# Altium PCB roneCPUBoard-v8.PcbDoc (part 2 of 3)
Units mil, origin at the board's own origin, x right, y up, seen from the top; angles counter-clockwise.
Board outline 3919.58 x 3919.51 mil, 2 copper layers (Top Layer, Bottom Layer); 146 components, 122 nets, 569 pads, 329 vias.
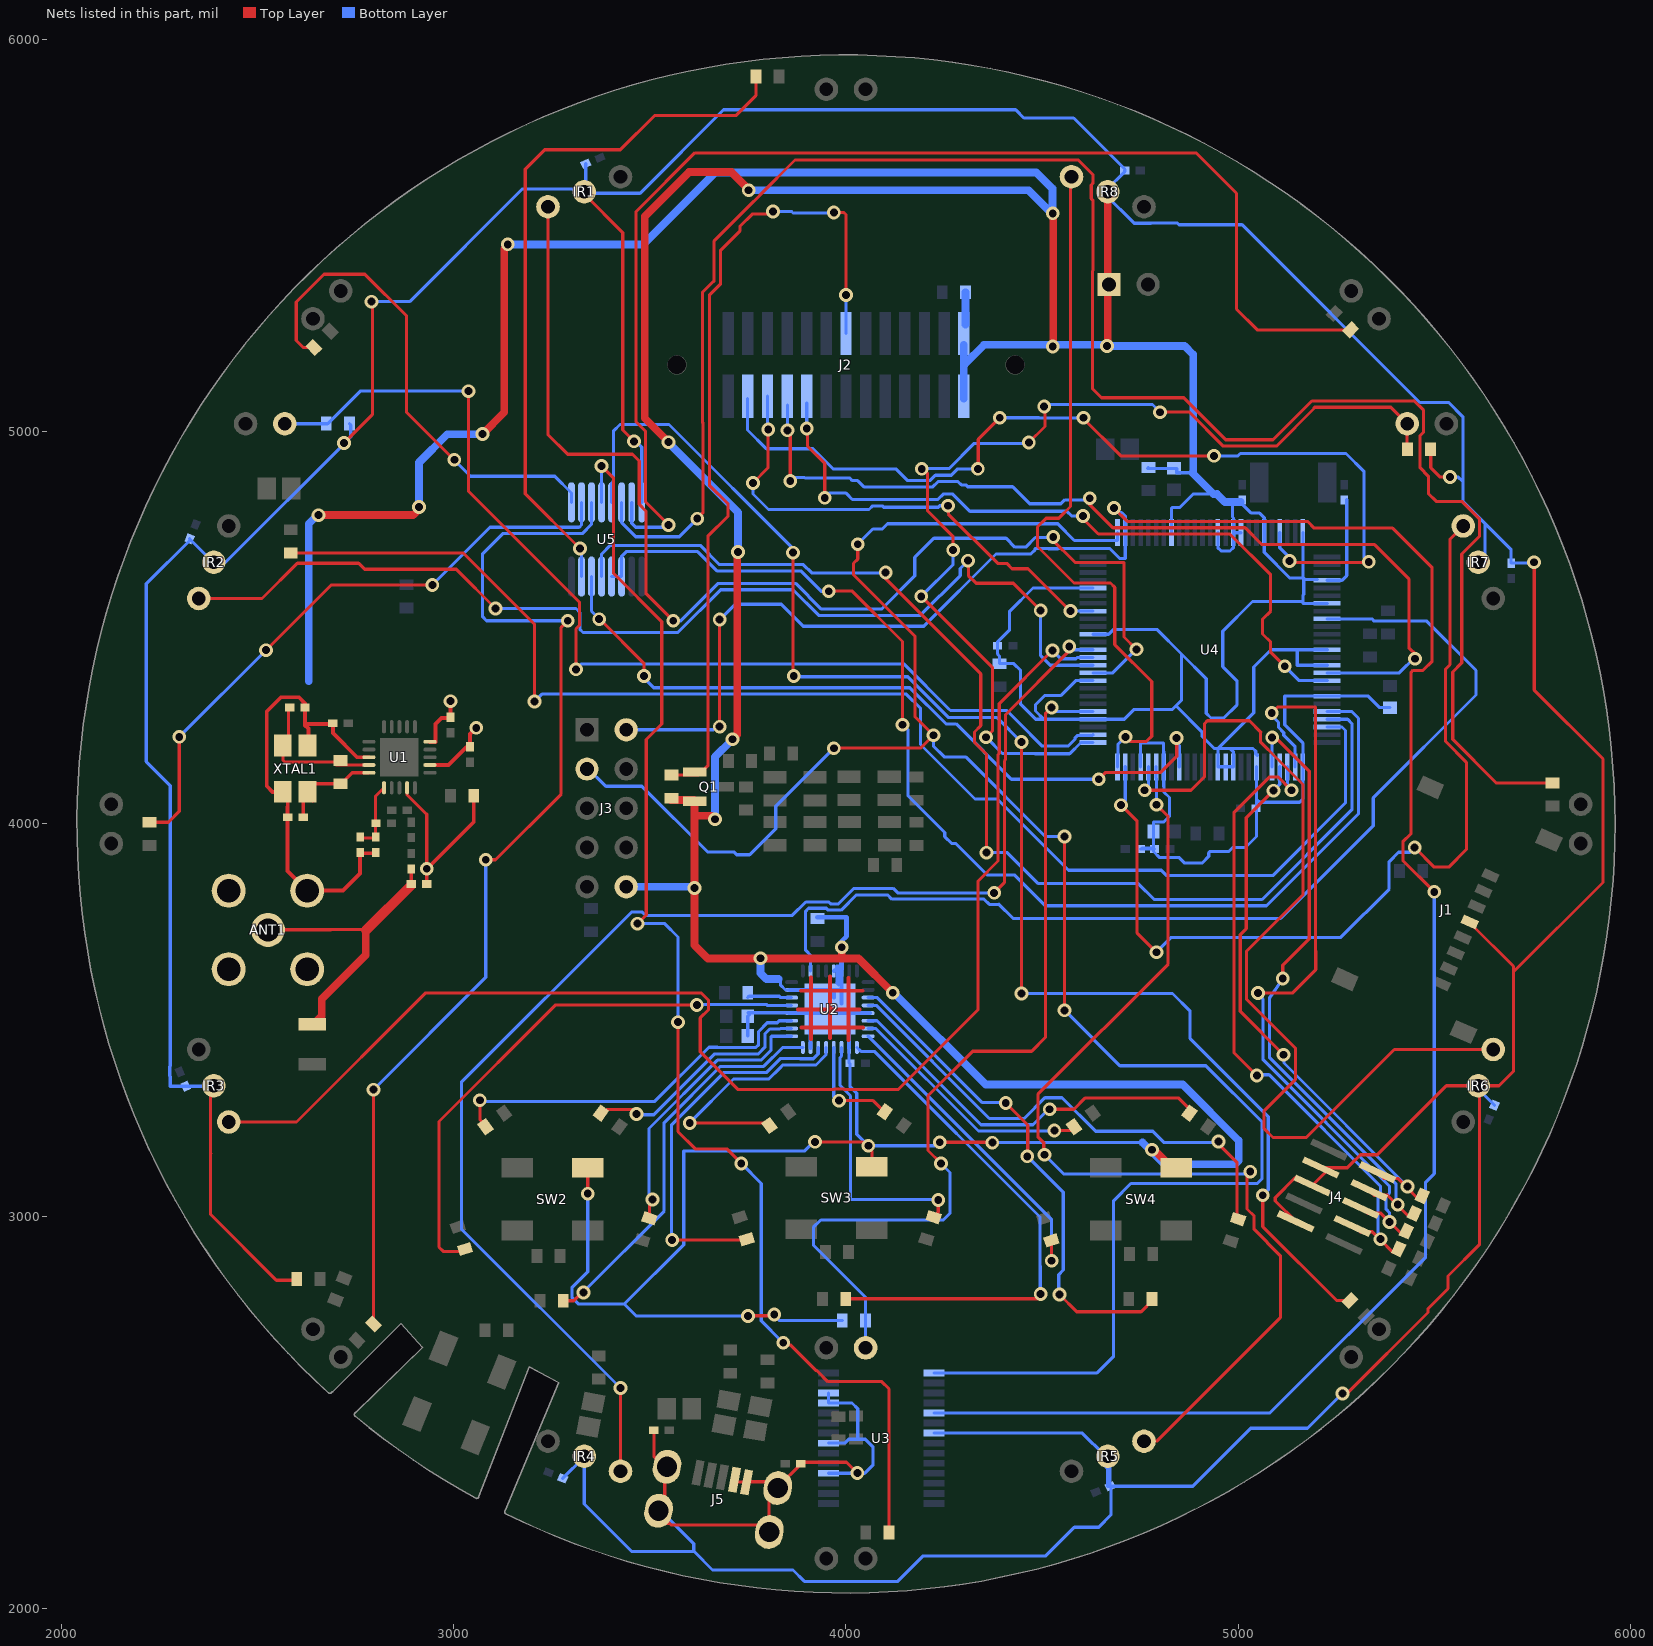
[diagram p2: the nets of this part, all layers, seen from the top]

## Via types
v1: diameter 35, hole 20, Top Layer to Bottom Layer, 321 vias
v2: diameter 25.98, hole 12.99, Top Layer to Bottom Layer, tented top, 4 vias
v3: diameter 110, hole 89, Top Layer to Bottom Layer, 4 vias

## Nets (pads, with @x,y where several pads share a name; then routed paths per layer and width w, separated by ;. In a path a pad name is that pad's centre, name@x,y a point inside that pad or via, vN(x,y) a via of type N, cw(c..) or ccw(c..) an arc to the next point about the centre after c; other vN are vias at no path point) (continued)
FTDI_RX: J3.3 U3.1 U4.26 | length 5383.3
  Top Layer w8: v1(3969,4193) 3970,4194 4191,4194 v1(4223,4226) 4176,4273 4176,4478.25 4019,4635.25 4019,4664 4030,4675 v1(4030,4713) ; v1(4557,3525) v1(4557,3968)
  Bottom Layer w8: J3.3@3340,4144 3388,4096 3480,4096 3647,3929 3714.28,3929 3721.78,3921.5 3754.5,3921.5 3821,3988 3821,4045 v1(3969,4193) ; v1@4032,4715 4068.5,4751.5 4092.22,4751.5 4105.72,4765 4539.5,4765 4582,4722.5 4691.78,4722.5 U4.26@4691.78,4742.23 ; v1(4223,4226) 4234,4226 4223,4215 4223,4198 4250,4171 4304.87,4171 4507.87,3968 v1(4557,3968) ; U3.1@4224,2601.34 U3.1@4224.45,2601.34 4640,2601.34 4682,2643.34 4682,3040 4726,3084 5048,3084 5060,3096 5060,3241 4917,3384 4698,3384 v1(4557,3525)
FTDI_TX: J3.2 U3.5 U4.27 | length 5970.4
  Top Layer w8: v1(3678,4248) v1(3678,4521) ; v1(4683,4805) 4717,4771 5176,4771 5193,4754 5238,4754 ; 5240,4754 5393,4754 5493.67,4653.33 5493.67,4414.8 5470.37,4391.5 5444.5,4391.5 5440,4387 5440,3975.74 5419,3954.74 5419,3907 v1(5499,3827)
  Bottom Layer w8: J3.2@3442,4240 3662,4240 3678,4256 v1(3678,4248) ; v1@3678,4520 3718,4560 3835,4560 3891,4504 4198.37,4504 4382.37,4688 4471,4688 4482,4699 4482,4702 4515.28,4702 4515.78,4701.5 4540.22,4701.5 4540.72,4702 4672,4702 4697.46,4676.54 4711.46,4676.54 U4.27@4711.46,4742.23 4711.46,4784 4702.46,4793 4695,4793 v1(4683,4805) ; U3.5@4224.45,2498.98 5079.98,2498.98 5477,2896 5477,3087 5499,3109 v1(5499,3827)
GND: ANT1.2 ANT1.3 ANT1.4 ANT1.5 C1.1 C2.1 C3.1 C4.1 C6.1 C7.1 C8.1 C9.1 C10.1 C11.1 C12.1 C13.1 C14.1 C15.1 C16.1 C17.1 C18.1 C20.1 C21.1 C22.1 C23.1 C24.1 C25.1 C26.1 C27.1 C28.1 C29.1 C30.1 C31.1 C32.1 IR1.2 IR2.2 IR3.2 IR4.2 IR5.2 IR6.2 IR7.2 IR8.2 J1.4 J2.25 J2.26 J3.10 J4.3 J4.5 J4.9 J5.4 J5.5 J5.6 J5.7 J5.8 J5.9 J6.1 Q1.2 R2.1 R6.2 R9.2 R25.1 R28.2 R35.1 R40.1 R41.1 R56.2 R68.1 SW2.2 SW3.2 SW4.2 U1.8 U1.14 U1.17 U1.20 U2.5 U2.10 U2.15 U2.20 U2.23 U2.29 U2.30 U2.33 U3.7 U3.18 U3.21 U3.25 U3.26 U4.4 U4.9 U4.15 U4.21 U4.33 U4.39 U4.41 U4.42 U4.45 U4.50 U4.54 U4.57 U4.63 U4.65 U4.69 U4.76 U4.82 U4.85 U4.86 U4.87 U4.94 U4.97 U5.8 XTAL1.2 XTAL1.4 | length 41129.3
  Top Layer w8: IR3.2@2381,3330 2381,3161 ; 2382,3160 2381,3161 ; XTAL1.2@2567,4081.89 2577.32,4071.57 2577.32,4043 ; R68.1@2600.47,2840 2598.38,2837.38 2548.62,2837.38 2381,3005 2381,3161 ; v1(2721,4971) 2793,5043 v1@2793,5332 ; C4.1@2762,3927.32 2762,3925.32 C3.1@2802,3925.32 ; U1.14@2881.69,4092.24 2881.69,4074.46 2881.46,4074.46 2931.69,4024.23 ; 3051.53,4005.53 R2.1@3051.53,4072 ; IR4.2@3333,2389 3341,2397 IR4.2@3341,2381 ; IR1.2@3334,5604 3431,5507 3431,5004 v1(3460,4975) ; v1(3342,3058) SW2.2@3342,3124 ; C15.1@3507.88,2457.43 C15.1@3510.32,2455 3510.32,2388.68 3539,2360 J5.6@3537,2358 ; J5.7@3522.3,2250.06 J5.7@3538,2234.36 ; J5.6@3538,2325.11 3543.89,2331 J5.6@3543.89,2333.89 ; J5.6@3543.89,2362.17 J5.6@3543.89,2333.89 ; R35.1@3545,4065.47 R35.1@3563,4065.47 ; Q1.2@3613.53,4065.47 3613.53,4057.6 Q1.2@3614.57,4057.6 ; J5.4@3715.93,2329.04 3715.93,2350 3720,2350 3720,2326 3716.04,2326 3716.04,2322.96 J5.5@3746.86,2322.96 ; 3736,2214 3558.36,2214 ; J5.5@3746.86,2307.83 J5.5@3746.86,2322.96 ; J5.5@3746.86,2323.09 J5.5@3746.86,2322.96 ; v1@3759,2747 v1@3815,2747 ; J5.9@3824,2308 3889.69,2373.69 4001.31,2373.69 v1(4029,2346) ; J5.9@3826.11,2307.83 J5.9@3804,2307.83 ; v1(3921,3190) v1@4043,3190 ; SW3.2@4066,3127 v1@4066,3166 ; v1(4239,3189) v1@4373,3189 ; IR8.2@4667,5611 IR8.2@4667,5614 ; SW4.2@4831,3124 SW4.2@4842,3124 ; J4.9@5145.68,2987.44 5094,3039.12 5094,3048 5145,3099 5154,3090 J4.5@5160,3090 ; J4.3@5209.57,3124.46 5277.46,3124.46 5297,3144 ; v1@5266,2549 5277.02,2549 5483,2754.98 5483,2765 5534,2816 5534,2848 5614.73,2928.73 5614.73,3329.27 IR6.2@5611,3333 5530,3333 5354,3157 5311,3157 ; 5312,3158 5311,3157 ; R9.2@5489.53,4955 5490,4952 5490,4908 5514,4884 v1(5539,4884) ; J1.4@5594,3744 5701,3637 ; IR6.2@5629,3333 5664,3333 5701,3370 5701,3637 ; v1@5753,4657 5754,4656 5754,4341 5929,4166 5929,3851 5701,3623 5701,3637 ; J5.7@3538,2234.36 3538,2218 3550,2218 3554,2214 3558.36,2214 ; J5.7@3538,2234.36 3538,2328 J5.6@3543.89,2333.89 ; 3558.36,2214 3804,2214 J5.9@3804,2307.83 ; J5.5@3746.86,2322.96 3746.96,2322.96 3746.96,2329.04 3746.86,2329.04 3751,2324.9 3751,2324 3804,2324 J5.9@3804,2307.83 ; J4.3@5221.76,3112.27 5224,3114.51 5233.49,3124 5278,3124 5311,3157 ; J4.3@5221.76,3112.27 J4.5@5188.27,3078.78 J4.3@5221.76,3112.27
  Top Layer w10: XTAL1.2@2567,4081.89 XTAL1.2@2565,4081.89 2539,4081.89 2524,4096.89 2524,4287 2560,4323 2606,4323 2621.69,4307.31 ; 2577.32,4043 C2.1@2577.32,4017 2577.32,3879.68 ANT1.4@2627,3830 ; C1.1@2621.69,4295 2621.69,4251.31 2629.99,4243 2629.99,4200 XTAL1.4@2627.99,4200 ; 2623,4255 2692.32,4255 2692.32,4231.68 2754,4170 U1.8@2784.24,4170 ; ANT1.4@2626,3830 ANT1.4@2627,3830 ; C4.1@2762,3925.32 2762,3874 2718,3830 ANT1.4@2627,3830 ; C6.1@2931.69,3845 C6.1@2931.69,3847 2931.69,3885.69 3051.53,4005.53 ; v1(2931.69,3886) 2931.69,4024.23 ; U1.17@2939.76,4150.32 2987,4150.32 3031.37,4194.69 3042,4194.69 C9.1@3042,4196.69 3042,4229 v1(3058,4245) ; U1.20@2939.76,4209.37 2954,4209.37 2954,4254.69 2969,4269.69 2992,4269.69 C7.1@2992,4271.69 v1(2992,4313) ; 3878,3527 4035,3527 ; 3885,3575 4042,3575 ; 3886,3481 4043,3481 ; 3911,3452 3911,3609 ; 3959,3455 3959,3612 ; 4006,3450 4006,3607
  Top Layer w20: v1(2656,4787) 2897,4787 v1@2915,4805 ; v1(3074,4994) 3129,5049 3129,5465 v1@3135,5471 ; v1(3548,4973) 3487,5034 3487,5548 3600,5661 3708,5661 v1@3753,5616 ; R35.1@3554,4061 Q1.2@3612.53,4061 ; Q1.2@3613.53,4057.6 3613.53,4021 ; v1@3656,4021 3613.53,4021 ; v1@3723,4228 v1@3723,4688 ; v1(3989,3686) 3989,3657 ; v1(4119,3570) 4032,3657 3989,3657 ; v1@4528,5217 v1@4528,5556 ; v1@4667,5218 IR8.2@4667,5611 ; v1@4782.5,3172.5 SW4.2@4831,3124 ; 3613.53,4021 3613.53,3691.47 3648,3657 3989,3657
  Bottom Layer w8: C11.1@2327.47,4726.81 C11.1@2329.64,4724.64 ; C11.1@2330,4725 C11.1@2329.64,4724.64 ; IR2.2@2389,4667 2419,4667 2730,4978 v1@2731,4978 ; IR3.2@2400,3331.81 C17.1@2317.53,3331.81 2278.19,3331.81 2278.19,3356.25 2276.85,3357.58 2276.85,3381.63 2278.19,3382.96 2278.19,4097.81 2217,4159 2217,4612 C11.1@2329.64,4724.64 ; v1@2730.5,4978.5 2738,4986 2738,5017 R6.2@2734.53,5020 ; v1(2791,5331) 2888,5331 3175,5618 IR1.2@3333,5618 ; C23.1@3278.19,2332.47 3278.47,2332.47 IR4.2@3333,2387 ; IR4.2@3333,2389 IR4.2@3333,2387 ; IR1.2@3333,5611 3336.73,5607.27 3475.27,5607.27 3688,5820 4432.37,5820 4453.37,5799 4580,5799 C12.1@4711,5668 ; IR1.2@3336.81,5607.19 IR1.2@3343,5601 ; IR1.2@3336.81,5611 C10.1@3336.81,5682.47 ; v1(3342,3058) 3342,2858.72 3301.5,2818.22 3301.5,2793.78 3318.78,2776.5 3435.22,2776.5 ; v1@3463,4977 3479.57,4960.43 U5.8@3479.57,4819.49 ; J5.7@3529,2249 3612,2166 3612,2147 ; C21.1@3749.56,3460 C14.1@3749.56,3510 C14.1@3754.95,3515.39 ; v1(3750,2746) 3466,2746 3435.36,2776.64 3586.5,2927.78 3586.5,3167 3895,3167 v1@3917,3189 ; C14.1@3750,3519 3856,3519 U2.20@3855,3518 ; v1@3817,2748 3830,2735 R28.2@3990.47,2735 ; 3832.83,3600.17 3832.83,3589.89 3845.72,3577 3856,3577 U2.23@3859,3577 ; U3.21@3955.55,2422.2 3997.2,2422.2 4007,2432 ; U3.25@3955.55,2524.57 4015.43,2524.57 4030,2510 4030,2432 ; U3.25@3955.55,2527.45 U3.26@3955.55,2550.16 ; U2.29@3969,3625.44 U2.29@3968.84,3625.44 3969,3625.6 3976,3632.6 3976,3638 3983,3638 3983,3593.72 3982.24,3593.72 ; 3976,3595 U2.33@3981.24,3589.76 ; 3977,3598.96 3977,3629 ; U2.30@3988.53,3625.44 U2.30@3988.53,3628.62 ; 4008,2432 4030,2432 ; C20.1@4008,3391 U2.10@4008,3429 ; C20.1@4010,3390 4010,3331.35 4027.5,3313.85 4027.5,3209.5 v1(4057,3180) v1@4227,3180 ; v1@4027.57,2345.43 U3.18@3955.55,2345.43 4047.43,2345.43 4069,2367 4069,2412 4049,2432 4030,2432 ; v1(4029,2346) v1@4029,2359.28 ; U3.7@4224.45,2447.8 4602.2,2447.8 4659,2391 4663,2391 4663,2360 4667,2356 ; v1(4373,3188) 4756,3188 ; U4.9@4629.77,4365.26 4585.26,4365.26 4547,4327 4506,4327 4483,4304 4483,4288 4504.17,4266.83 ; U4.15@4629.77,4483.37 4669.37,4483.37 4682,4496 4792,4496 4855,4433 ; U4.21@4629.77,4601.48 4476.48,4601.48 4417.08,4542.08 4417.08,4495.08 4386.32,4464.32 C22.1@4386.32,4454 4386.32,4432.68 4391,4428 R41.1@4391,4408.53 4427.47,4408.53 4445,4391 4445,4304.92 4483.09,4266.83 4504.17,4266.83 ; IR8.2@4661,5604 4734.27,5530.73 4776.78,5530.73 4777.05,5531 4844.63,5531 4848.63,5527 4995,5527 ; IR5.2@4667,2389 4667,2356 ; IR8.2@4667,5611 4667,5617 4665,5617 4710.32,5662.32 C12.1@4710.32,5665 ; IR5.2@4673.19,2382.81 C24.1@4673.19,2313 ; C28.1@4750.69,3936 4767.44,3936 ; U4.97@4750.83,4145.77 4750.83,4204.83 4752,4206 4771,4206 ; C28.1@4754.56,3938.56 C32.1@4783.44,3938.56 ; 4767.44,3938.56 4767.44,3936 ; 4767.94,4206 4771,4206 ; R40.1@4771,4908.53 4768.04,4905.96 4842.96,4905.96 4842.96,4894.92 4882.4,4894.92 ; C32.1@4786.31,3936 C32.1@4783.44,3936 ; U4.33@4829.57,4742.23 4829.57,4805.12 ; 4830.6,4806.15 4849.84,4806.15 4884.19,4840.5 4936.82,4840.5 ; 4840.89,4300.89 4908,4233.79 4908,4223 4939,4192 4947.69,4192 ; 4855,5527 4995,5527 ; U4.39@4947.69,4742.23 4947.69,4704 4956.19,4695.5 4978.56,4695.5 4987.06,4704 U4.41@4987.06,4742.23 ; 4985,4782.06 4985,4820.31 ; 4987.06,4780 U4.41@4987.06,4742.23 ; C29.1@5006,4819 5033,4792 5054,4792 5065.8,4780.2 U4.45@5065.8,4742.23 5065.8,4692 5131.3,4626.5 5166.61,4626.5 ; U4.42@5006.74,4742.23 U4.41@4987.06,4742.23 ; U4.82@5046.11,4145.77 5046.11,4063.65 ; U4.82@5047.89,4175 5044.33,4178.56 5044.33,4185.19 5037.3,4192.22 4995.86,4192.22 4995.64,4192 4979.06,4192 ; 5150,4440.06 5150,4404.63 U4.65@5226.23,4404.63 ; 5164.22,4626.78 U4.50@5164.22,4742.23 ; 5165,4583.17 5165,4567 ; 5166.61,4584.78 5166.61,4626.5 ; 5166.61,4626.61 5166.61,4626.5 ; U4.54@5201.06,4622.94 5170.17,4622.94 5166.61,4626.5 ; U4.63@5226.23,4444 5083,4444 5039,4400 5039,4283.31 4947.69,4192 ; U4.57@5226.23,4562.11 5165,4562.11 5165,4567 ; U4.54@5226.23,4621.17 5264.17,4621.17 5276,4633 C30.1@5276,4826.31 ; v1@5266,2550 5176,2460 5031,2460 4883.53,2312.53 C24.1@4675,2312.53 ; C27.1@5386,4296.44 5360.28,4296.44 5330.83,4325.89 U4.69@5226.23,4325.89 5118,4325.89 5118,4252.96 5164.22,4206.74 U4.76@5164.22,4145.77 5164.22,4095.5 5164.5,4095.22 5164.5,4064 5156,4055.5 5054.26,4055.5 5046.11,4063.65 ; v1(5539,4884) 5560,4884 5571,4873 ; IR6.2@5611,3332 5611,3324.72 C18.1@5652.53,3283.19 ; IR7.2@5612.31,4664.69 5628,4680.37 5628,4766 ; v1@5757.69,4664.69 C13.1@5695,4664.69 5695,4699 5628,4766 ; C11.1@2329.64,4724.64 2389.28,4665 2388.14,4666.14 C11.1@2329.64,4724.64 ; IR4.2@3333,2387 3333,2267 3454,2146 3613,2146 3660,2099 3865,2099 3894,2070 4132,2070 4197,2135 4509,2135 4582,2208 4644,2208 4675,2239 C24.1@4675,2312.53 ; 4504.17,4266.83 U4.4@4629.77,4266.83 4709,4266.83 4734.17,4292 4832,4292 4855,4315 4855,4433 ; 4667,2356 4667,2312.53 C24.1@4673.19,2312.53 ; C24.1@4673.19,2312.53 C24.1@4675,2312.53 ; C24.1@4673.19,2312.53 C24.1@4673.19,2313 ; C24.1@4673.19,2313 4675,2313 C24.1@4675,2312.53 ; 4767.44,3936 C32.1@4783.44,3936 ; 4771,4206 4809,4206 4809,4184.89 4809.89,4184 U4.94@4809.89,4145.77 4809.89,4096 4810.03,4095.86 4810.03,4081.61 4824.32,4067.32 4824.32,4019.32 4810,4005 4783.44,4005 C31.1@4783.44,3981 C32.1@4783.44,3938.56 ; C32.1@4783.44,3936 4783.44,3930 4799.28,3914.16 4849.4,3914.16 4863.17,3900.39 4907.11,3900.39 4924.5,3917.78 4924.5,3926.5 4928.28,3930.28 4975.91,3930.28 4985.62,3940 5018.11,3940 5046.11,3968 5046.11,4063.65 ; C32.1@4783.44,3936 C32.1@4783.44,3938.56 ; 4855,4433 4918,4370 4918,4282 4930,4270 4963,4270 4996,4303 4996,4365 4960,4401 4960,4491 5036,4567 5165,4567 ; 4947.69,4192 U4.87@4947.69,4145.77 U4.86@4967.37,4145.77 U4.85@4987.06,4145.77 4987.06,4184 4979.06,4192 ; 4947.69,4192 4979.06,4192 ; 4995,5527 5009.37,5527 5462.37,5074 5536,5074 5572,5038 5572,4822 5628,4766
  Bottom Layer w10: v1@2992,4309 v1(2992,4313) ; v1@3058,4243 v1(3058,4245) ; U2.20@3855,3518 U2.33@3910,3518 ; U2.23@3856,3577 U2.33@3966,3577 ; U2.15@3910,3429 U2.33@3910,3518 ; U2.33@3910,3522 U2.33@3910,3518 ; U2.33@3969,3558 3969,3577 U2.33@3983,3577 ; U2.29@3969,3625.44 3969,3625.6 U2.29@3969,3626 ; U2.30@3988.53,3628.62 3989,3630 U2.33@3989,3542 ; U2.10@4008,3429 U2.33@4008,3516 ; U2.5@4061,3518 U2.33@3910,3518
  Bottom Layer w12: R25.1@3927,3762.5 4001.5,3762.5 4001.5,3713.78 v1@3988.53,3700.81 ; U2.30@3988.53,3628.62 v1@3988.53,3686
  Bottom Layer w20: 2631,4364 2631,4765 v1@2655,4789 ; v1(2912,4808) 2912,4921 2984,4993 v1@3077,4993 ; v1(3138,5477) 3484,5477 3667,5660 4485,5660 4526,5619 v1@4526,5558 ; J3.10@3440,3840 3607,3840 v1@3615,3832 ; v1@3549,4970 3725,4794 v1(3725,4693) ; v1(3666,4012) 3666,4171 v1@3710,4215 ; v1(3752,5615) 4465,5615 v1@4525.5,5554.5 ; v1(3782,3658) 3782,3620 3797,3605 3828,3605 ; v1@4122,3570 4356,3336 4858,3336 5001,3193 5001,3142 4992,3133 4811,3133 4756,3188 ; J2.26@4300,5084 J2.26@4300,5089.98 J2.25@4300,5221 ; 4303,5172 4352,5221 v1@4660.7,5221 ; J2.25@4304.53,5272.47 R56.2@4304.53,5355 ; v1(4665,5218) 4863,5218 4885,5196 4885,4893 ; 4882.4,4894.92 4936.82,4840.5 ; 4945.32,4840.5 4965.5,4820.31 4985,4820.31 C29.1@5006,4820.31
  other v1: 5265,2549 3817,2750 4780,3170 3614,3837 3711,4216 5753,4667 4527,5217 4527,5556
IR_CLK: U4.71 U5.11 U5.12 | length 2962.2
  Top Layer w8: v1@3964,4594 4015,4594 4144,4465 v1(4144,4253)
  Bottom Layer w8: U5.12@3402.8,4630.51 U5.11@3428.39,4630.51 3428.39,4682.39 3440,4694 3622,4694 3671,4645 3884.91,4645 3937.91,4592 ; v1@4146,4252 4158,4240 4158,4071.63 4251.5,3978.13 4251.5,3967.78 4268.78,3950.5 4279.13,3950.5 4359.2,3870.43 4428.6,3870.43 4507.53,3791.5 5071.5,3791.5 5306,4026 5306,4269.2 5288.68,4286.52 U4.71@5226.23,4286.52
  other v1: 3956,4593
IR_DATA: U4.92 U5.14 | length 1920.1
  Top Layer w8: v1@3372,4522 3373,4522 3485,4410 3485,4379 v1@3486,4378 ; v1(4644,4114) 4661.5,4131.5 4802,4131.5 4843,4172.5 v1@4843,4217
  Bottom Layer w8: U5.14@3351.61,4630.51 3351.61,4542.39 v1@3371,4523 ; v1@3485,4375 3488,4378 3488,4369 3510,4347 4162.87,4347 4254.87,4255 4280.5,4255 4421.5,4114 v1(4644,4114) ; v1@4847,4215 4847,4202 4849.26,4199.74 U4.92@4849.26,4145.77
  other v1: 4842,4219 3485,4377 3371,4522
IR_EMIT_0: R4.2 U5.15 | length 1812
  Top Layer w8: v1(3322.05,4702) 3182.61,4841.44 3182.61,5668.61 3232,5718 3425,5718 3512,5805 3719.47,5805 3770.47,5856 R4.2@3770.47,5905
  Bottom Layer w8: v1(3322.05,4702) 3326.02,4698.02 U5.15@3326.02,4630.51
IR_EMIT_1: R19.2 U5.1 | length 1284.3
  Top Layer w8: R19.2@2644.12,5214.12 2616.88,5214.12 2599,5232 2599,5330 2670,5401 2774,5401 2880,5295 2880,5049 3001,4928 v1(3002,4928)
  Bottom Layer w8: v1(3002,4928) 3001,4928 3043,4886 3258.43,4886 ; 3257,4887 3300.43,4843.57 U5.1@3300.43,4819.49
IR_EMIT_2: R14.2 U5.2 | length 1583.6
  Top Layer w8: R14.2@2225,4004.53 2273.53,4004.53 2301,4032 v1(2301,4222) ; v1(2522,4443) 2688,4609 v1(2946,4609)
  Bottom Layer w8: v1(2301,4222) v1(2522,4443) ; v1(2946,4609) 3093,4756 3320,4756 3326.02,4762.02 U5.2@3326.02,4819.49
IR_EMIT_3: R27.2 U5.3 | length 2758.4
  Top Layer w8: R27.2@2795.88,2725.88 v1(2795.88,3323) ; v1(3082,3909) 3107,3909 3274,4076 3274,4501 v1(3291,4518)
  Bottom Layer w8: v1(2795.88,3323) 3082,3609.12 v1(3082,3909) ; v1(3291,4518) 3084,4518 3074,4528 3074,4689 3125,4740 3328,4740 3351.61,4763.61 U5.3@3351.61,4819.49
IR_EMIT_4: R32.2 U5.4 | length 3331.4
  Top Layer w8: v1(3377.2,4912) 3408,4881.2 3408,4638.13 3530.5,4515.63 3530.5,4254.75 3491,4215.25 3491,3768 v1(3469,3746) ; v1(3572,3495) 3572,3216 3616,3172 3696,3172 v1(3733,3135) ; v1@3842,2672 3859.37,2672 3924.37,2607 3925.98,2607 3953.98,2579 4091,2579 4109.53,2560.47 R32.2@4109.53,2195
  Bottom Layer w8: U5.4@3377.2,4819.49 v1(3377.2,4912) ; v1(3469,3746) 3538,3746 3572,3712 v1(3572,3495) ; v1(3733,3135) 3784,3084 3784,2734 v1@3837,2681
  other v1: 3840,2678
IR_EMIT_5: R26.2 U5.5 | length 3785.5
  Top Layer w8: v1@3865,4381 v1(3865,4691.37) ; v1(4447,3568) v1(4447,4209) ; v1(5062,3054) 5062,2974 5250,2786 R26.2@5286,2786
  Bottom Layer w8: U5.5@3402.8,4819.49 3402.8,4869 3408,4874.2 3408,5002 3424,5018 3549,5018 3871,4696 v1(3865,4691.37) ; v1@3867,4376 3866,4375 4157.5,4375 4261.5,4271 4385,4271 v1(4447,4209) ; v1(4447,3568) 4832,3568 4877,3523 4877,3453 5076,3254 5076,3068 v1(5062,3054)
  other v1: 3867,4377
IR_EMIT_6: R13.2 U5.6 | length 4835.6
  Top Layer w8: v1@3623,4781 3636,4794 3636,5021.37 3634,5023.37 3634,5354.28 3662.5,5382.78 ; 3664,5382 3664,5486 3763.5,5585.5 3764.22,5585.5 3781.5,5602.78 3781.5,5603.5 3870,5692 4592,5692 4629,5655 4629,5632.4 4625,5628.4 4625,5593.6 4629,5589.6 4629,5410.03 4628.47,5409.5 4628.47,5108.53 4651,5086 4860.63,5086 4967.63,4979 5088.12,4979 5187.12,5078 5445,5078 ; 5447.5,5078.5 5472,5054 5472,4999 5463,4990 5463,4907.43 5484.02,4886.41 5484.02,4841.98 5504,4822 5569.52,4822 5614.73,4776.79 5614.73,4733.73 5569,4688 5569,4410.41 5546.03,4387.43 5546.03,4215.5 5657,4104.53 R13.2@5800,4104.53
  Bottom Layer w8: U5.6@3428.39,4819.49 3428.39,4768 3464.39,4732 3575,4732 v1(3621,4778)
IR_EMIT_7: R7.2 U5.7 | length 3229.5
  Top Layer w8: v1(3548,4762) 3489,4821 3489,4962.28 3489.5,4962.78 3489.5,4987.22 3489,4987.72 3489,5000.89 3465,5024.89 3465,5560 3615,5710 4892,5710 4995,5607 4995,5312 5047.88,5259.12 R7.2@5285.88,5259.12
  Bottom Layer w8: U5.7@3453.98,4819.49 3453.98,4766.02 3464,4756 3542,4756 v1(3548,4762)
IR_RECV_0: IR1.1 U4.10 | length 3019.5
  Top Layer w8: IR1.1@3240.61,5572.73 3240.61,4992 3290.61,4942 3456,4942 3473,4925 3473,4814.37 3490,4797.37 3490,4588 v1(3560,4518) ; v1@4524.5,4725.5 4583.5,4666.5 4708.5,4666.5 4708.5,4476.5 v1(4740,4445)
  Bottom Layer w8: v1(3560,4518) 3579.09,4518 3674.09,4613 3871.65,4613 3937.15,4547.5 4090.5,4547.5 4175.24,4632.24 4175.24,4679.24 4224,4728 4408,4728 4430.5,4705.5 4458.22,4705.5 4482.72,4730 4525,4730 v1@4528,4727 ; U4.10@4629.77,4384.94 4679.94,4384.94 v1(4740,4445)
  other v1: 4528,4731
IR_RECV_1: IR2.1 U4.11 | length 2746.9
  Top Layer w8: IR2.1@2350.73,4574.61 2512,4574.61 2601.89,4664.5 2758,4664.5 2773.5,4649 3007,4649 v1(3107,4549) ; v1@4312,4668 4312,4633 4331.5,4613.5 4426.5,4613.5 v1(4496,4544)
  Bottom Layer w8: v1(3107,4549) 3312,4549 3322,4539 3322,4496 3330,4488 3571.72,4488 3680.72,4597 3865.03,4597 3930.53,4531.5 4189.5,4531.5 4291,4633 4291,4651 v1@4308,4668 ; v1(4496,4544) 4496,4429 4520.37,4404.63 U4.11@4629.77,4404.63
  other v1: 4311,4671
IR_RECV_2: IR3.1 U4.12 | length 3447
  Top Layer w8: IR3.1@2427.27,3240.61 2599.61,3240.61 2928,3569 3631.72,3569 3649.5,3551.22 3649.5,3526.78 3628.5,3505.78 3628.5,3419.5 3725,3323 3968.28,3323 3969.78,3324.5 3994.22,3324.5 3995.22,3323.5 4133.5,3323.5 4336.5,3526.5 4336.5,3854.5 4387.5,3905.5 4387.5,4176.93 4390.5,4179.93 4390.5,4306.5 v1(4526,4442)
  Bottom Layer w8: v1(4526,4442) 4547,4421 4585.69,4421 4589,4424.31 U4.12@4629.77,4424.31
IR_RECV_3: IR4.1 U4.13 | length 3508
  Top Layer w8: IR4.1@3425.39,2350.73 v1(3425.39,2562.61) ; v1(4377.5,3824.5) 4403.5,3850.5 4403.5,4160.93 4406.5,4163.93 4406.5,4278.56 4569,4441.06 v1(4569,4452)
  Bottom Layer w8: v1(3425.39,2562.61) 3020,2968 3020,3342 3453.5,3775.5 3481.22,3775.5 3489.72,3767 3863.38,3767 3897.68,3801.31 3956.31,3801.31 3961.12,3796.5 3980.87,3796.5 4020.37,3836 4119.99,3836 4131.49,3824.5 v1(4377.5,3824.5) ; v1(4569,4452) 4577,4444 U4.13@4629.77,4444
IR_RECV_4: IR5.1 U4.95 | length 2574.5
  Top Layer w8: v1@4504,3163 4504,3188 4489,3203 4489,3311 4821,3643 4821,4019 v1(4791,4049) ; IR5.1@4759.39,2427.27 4792.27,2427.27 5107,2742 5107,2900 5040,2967 5040,3001 5022,3019 5022,3106 v1(5030,3114)
  Bottom Layer w8: v1(4506,3157) 4555,3108 5024,3108 v1(5030,3114) ; U4.95@4790.2,4145.77 4790.2,4117 4791,4116.2 v1(4791,4049)
IR_RECV_5: IR6.1 U4.96 | length 2414.2
  Top Layer w8: v1(4761,4086) 4879,4086 4914,4121 4914,4256 4921,4263 4961,4263 ; 4957,4263 5028.39,4263 5057.19,4234.2 5056.5,4233.52 5056.5,4208.39 5096.89,4168 5097,4168 5164.5,4100.5 5164.5,3819.5 5020.5,3675.5 5020.5,3553.5 5145,3429 5145,3348.56 5065.44,3269 5065.44,3223.56 5088,3201 5173,3201 5397.39,3425.39 IR6.1@5649.27,3425.39
  Bottom Layer w8: v1(4761,4086) 4770.52,4095.52 U4.96@4770.52,4145.77
IR_RECV_6: IR7.1 U4.99 | length 2360.2
  Top Layer w8: v1(4701,4048) 4742,4007 4742,3722 v1(4791,3673) ; v1(5449,3940) 5499,3890 5536,3890 5581,3935 5581,4157 5528,4210 5528,4395 5539,4406 5539,4725.66 IR7.1@5572.73,4759.39
  Bottom Layer w8: v1(4701,4048) 4711.46,4058.46 U4.99@4711.46,4145.77 ; v1(4791,3673) 4829,3711 5261,3711 5384,3834 5384,3904 5408,3928 5437,3928 v1(5449,3940)
IR_RECV_7: IR8.1 U4.100 | length 1816.5
  Top Layer w8: 4542,4779 4510,4779 4488,4757 4488,4707 4581,4614 4674,4614 4685,4603 4685,4457 4779,4363 4779,4223.63 4765.37,4210 4724,4210 v1(4712,4222) ; 4543,4780 4572,4809 4572,4955.28 4572.5,4955.78 4572.5,4980.22 4572,4980.72 4572,5646.66 IR8.1@4574.61,5649.27
  Bottom Layer w8: U4.100@4691.78,4145.77 4691.78,4176 4693,4177.22 4693,4203 v1(4712,4222)
JTAG_TCK: J4.4 R12.1 U4.80 | length 1638
  Top Layer w8: v1(5086,4220.61) 5094.17,4220.61 5180.5,4134.28 5180.5,3707.5 5113,3640 v1@5113,3607 ; J4.4@5333.03,3066.89 5345.91,3054 5380,3054 5432,3002 R12.1@5448.24,3002 ; R12.1@5448.24,3007.48 R12.1@5448.24,3002 ; R12.1@5456,3002 R12.1@5448.24,3002
  Bottom Layer w8: 5079,3556 v1@5113,3605 ; 5079.5,3556.78 5079,3556.28 5079,3405.37 5401,3083.37 5401.5,3082.87 5401.5,3034.5 v1(5406,3030) ; U4.80@5085.48,4145.77 5085.48,4220.09 v1(5086,4220.61)
  other v1: 5113,3606
JTAG_TDI: J4.8 R18.1 U4.78 | length 1694.7
  Top Layer w8: v1(5047,3359) 4988.5,3417.5 4988.5,4028.5 5080,4120 5101,4120 v1(5135,4086) ; J4.8@5290.43,2975.54 5295.46,2975.54 5310,2961 5341,2961 5361,2941 5393,2909 5408.24,2909 5413,2909 5413,2917.48 R18.1@5408.24,2917.48
  Bottom Layer w8: v1@5045,3361 5078.12,3361 5362,3077.12 5362,3060.35 5355.5,3053.85 5355.5,2948.5 v1(5362,2942) ; U4.78@5124.85,4145.77 5124.85,4096.15 v1(5135,4086)
JTAG_TDO: J4.6 R17.1 U4.77 | length 1986.3
  Top Layer w8: v1@5054,3569 5137,3569 5197,3629 5197,3676.5 5196.5,3677 5196.5,4297.5 5196,4298 5100,4298 v1(5085,4283) ; J4.6@5311.73,3021.22 5316.78,3021.22 5330,3008 5363,3008 v1(5385,2986) 5412,2959 R17.1@5428.24,2959 ; R17.1@5428.24,2962.48 R17.1@5428.24,2959 ; R17.1@5435,2959 R17.1@5428.24,2959
  Bottom Layer w8: v1@5052,3564 5063,3553 5063,3398.75 5385,3076.75 5385,3059.22 5376.5,3050.72 5376.5,3017.78 5385,3009.28 v1(5385,2986) ; v1@5084,4277 5102,4259 5102,4246.33 5115.5,4232.83 5115.5,4226.13 5144.54,4197.1 U4.77@5144.54,4145.77
  other v1: 5050,3569
JTAG_TMS: J4.2 R11.1 U4.79 | length 1439.5
  Top Layer w8: v1(5089.17,4085) 5020,4015.83 5020,3733.4 5004.5,3717.9 5004.5,3522.5 v1(5115,3412) ; J4.2@5354.32,3112.56 5369.88,3097 5406,3097 5429,3074 5459,3044 5468.24,3044 R11.1@5468.24,3052.48
  Bottom Layer w8: v1(5089.17,4085) 5105.17,4101 U4.79@5105.17,4145.77 ; v1@5116,3413 5116,3391 v1(5431,3076)
LED_BLUE_0: D21.2 U2.3 | length 1288.8
  Top Layer w8: v1(4407,3289) 4463,3233 v1@4463,3154 ; v1(4544,2801) 4588,2757 4752,2757 4782,2787 D21.2@4779.53,2790
  Bottom Layer w8: U2.3@4056.44,3557.53 4080.1,3557.53 4347.63,3290 4407,3290 v1@4410,3290 ; v1(4462,3153) 4553.5,3061.5 4553.5,2863.28 4542,2851.78 v1@4542,2802
LED_BLUE_1: D19.2 U2.4 | length 1301.9
  Top Layer w8: v1(4949,3191) 4949,3185 4996,3138 4996,2999 4999.12,2999 D19.2@4999.12,2993.08
  Bottom Layer w8: U2.4@4056.44,3537.84 4077.16,3537.84 4365.5,3249.5 4453.78,3249.5 4506.78,3302.5 4550.5,3302.5 4636,3217 4782,3217 4811,3188 v1@4949,3188
LED_BLUE_2: D13.2 U2.6 | length 977.2
  Top Layer w8: v1(4519,3273) 4581,3273 4610,3302 4847,3302 4876,3273 4875.11,3273 D13.2@4875.11,3263.36
  Bottom Layer w8: U2.6@4056.44,3498.47 4079.16,3498.47 4344.13,3233.5 4476.5,3233.5 v1@4516,3273
LED_BLUE_3: D12.2 U2.7 | length 638.8
  Top Layer w8: v1(4531,3219) 4572,3219 4581.38,3228.38 D12.2@4583,3230
  Bottom Layer w8: U2.7@4056.44,3478.79 4076.21,3478.79 4337.5,3217.5 v1@4530.5,3217.5
LED_BLUE_4: D18.2 U2.8 | length 820.8
  Top Layer w8: D18.2@4523.12,2938.92 4524,2936 v1(4524,2887)
  Bottom Layer w8: U2.8@4056.44,3459.1 4524,2991.54 v1(4524,2887) v1@4524,2884
LED_EXTRA: D17.2 U2.22 | length 115.4
  Bottom Layer w8: D17.2@3749,3557.53 3752.47,3561 3829.95,3561 3833.42,3557.53 U2.22@3861.56,3557.53
LED_GREEN_0: D14.2 U2.9 | length 1335.6
  Top Layer w8: D14.2@3999.53,2790 4488,2790 v1@4495,2797
  Bottom Layer w8: U2.9@4027.9,3430.56 4038,3420.46 4072.46,3420.46 4494.5,2998.41 4494.5,2874.28 4495,2873.78 v1@4495,2807
  other v1: 4496,2802
LED_GREEN_1: D9.2 U2.11 | length 670.9
  Top Layer w8: D9.2@4221,2997 4222.6,2998.6 4235,3011 v1(4235,3042)
  Bottom Layer w8: 3985,3334 3985,3405 3988.53,3408.53 U2.11@3988.53,3430.56 ; 3986.51,3332.21 4011.5,3307.22 4011.5,3043 v1@4234,3043
LED_GREEN_2: D7.2 U2.12 | length 264.5
  Top Layer w8: v1(3982,3295) 4069,3295 D7.2@4092,3272
  Bottom Layer w8: U2.12@3968.84,3430.56 3968.84,3304.16 3980,3293 v1@3982,3291
LED_GREEN_3: D5.2 U2.13 | length 645.7
  Top Layer w8: v1(3602,3238) 3803,3238 3803,3231.64 D5.2@3805.11,3231.64
  Bottom Layer w8: v1@3603,3240 3713.28,3350.28 3803.41,3350.28 3831.07,3377.93 3838.96,3385.83 3923.42,3385.83 3946.3,3408.7 3949.16,3411.56 U2.13@3949.16,3430.56
LED_GREEN_4: D8.2 U2.14 | length 954.6
  Top Layer w8: v1(3557,2940) 3742,2940 3742,2941.92 D8.2@3747.12,2941.92
  Bottom Layer w8: v1@3555,2939 3555,3223 ; 3555,3226 3555,3223 ; 3883,3402 3832.5,3402 3796.79,3366.28 3688.56,3366.28 3555,3232.72 3555,3223 ; 3883.09,3401.83 3916.8,3401.83 3929.47,3414.5 U2.14@3929.47,3430.56
LED_HEARTBEAT: R10.1 U4.73 | length 3526.9
  Top Layer w8: R10.1@2585,4690.47 3025,4690.47 3206,4509.47 v1(3206,4312)
  Bottom Layer w8: v1@3205.19,4311.19 3225,4331 4154,4331 4190,4295 4190,4202.5 4328.87,4063.63 4385.67,4063.63 4567.15,3882.16 4803.63,3882.16 4817.4,3868.39 5087.51,3868.39 5273,4053.87 5273,4238.15 5264,4247.15 U4.73@5226.23,4247.15
LED_IR_BEACON: J2.13 Q1.1 R35.2 | length 2171.9
  Top Layer w8: R35.2@3545,4124.53 3623.53,4124.53 Q1.1@3623.53,4132.4 ; Q1.1@3614.57,4132.4 Q1.1@3623.53,4132.4 ; v1@3812,5554 3761,5554 3729.5,5522.5 3729.5,5510.59 3680,5461.09 3680,5375.37 3652,5347.37 3652,4863 3699.5,4815.5 3699.5,4784.78 3648,4733.28 3648,4148.4 3632,4132.4 Q1.1@3623.53,4132.4 ; v1(3969,5558) 3995,5558 4000,5553 v1(4000,5348) v1@4000,5339
  Bottom Layer w8: v1(3814,5561) 3861,5561 3865,5557 v1@3972,5557 ; J2.13@4000,5250.02 v1@4000,5346
LED_IR_COMMS: U4.72 U5.13 | length 3021.8
  Top Layer w8: v1(4101,4641) 4101,4625 4343.5,4382.5 4343.5,4250.5 4327.5,4234.5 4327.5,4207.85 4358,4177.35 v1(4358,3927)
  Bottom Layer w8: U5.13@3377.2,4630.51 3377.2,4688 3399.2,4710 3628.63,4710 3677.63,4661 3891.54,4661 3912.54,4640 4085.78,4640 4086.78,4641 4093.89,4633.89 v1(4101,4641) ; v1(4358,3927) 4411.11,3927 4490.11,3848 4744.9,3848 4785.4,3807.5 5060.4,3807.5 5289,4036.1 5289,4256 5278.17,4266.83 U4.72@5226.23,4266.83
LED_MODE: U2.26 U4.59 | length 2686.3
  Bottom Layer w8: U2.26@3909.79,3625.44 3909.79,3665 3897,3677.79 3897,3778 3904.31,3785.31 3949.69,3785.31 3954.49,3780.5 3987.5,3780.5 4026,3819 4106.5,3819 4117,3808.5 4351.78,3808.5 4365.28,3795 4389.72,3795 ; 4389.5,3795.5 4425.5,3759.5 5107.5,3759.5 5343.5,3995.5 5343.5,4066.5 5605.5,4328.5 5605.5,4391.5 5480,4517 5346,4517 5340.26,4522.74 U4.59@5226.23,4522.74
LED_RED_0: D20.2 U2.16 | length 1006.4
  Top Layer w8: D20.2@3279.53,2785 3306,2785 v1@3328,2807
  Bottom Layer w8: v1@3331,2808 3536.5,3013.5 3536.5,3238.5 3680.28,3382.28 3790.16,3382.28 3838.43,3430.56 U2.16@3890.1,3430.56
  other v1: 3331,2806
LED_RED_1: D16.2 U2.17 | length 717.2
  Top Layer w8: D16.2@3499.12,2995.08 3499.12,3030.12 v1@3510,3041
  Bottom Layer w8: v1(3507,3043) 3505,3043 3498,3050 3498,3224 3672.28,3398.28 3783.53,3398.28 3809.31,3424.06 3809.31,3458.05 3810.36,3459.1 U2.17@3861.56,3459.1
LED_RED_2: D11.2 U2.18 | length 611.3
  Top Layer w8: D11.2@3375.11,3263.36 3381.36,3263.36 3390,3272 3460,3272 3460,3267 v1(3466,3261)
  Bottom Layer w8: v1@3464,3261 3466,3259 3510,3259 3665.28,3414.28 3776.9,3414.28 3793.31,3430.69 3793.31,3464.68 3806.13,3477.5 3831.47,3477.5 3832.76,3478.79 U2.18@3861.56,3478.79
LED_RED_3: D10.2 U2.19 | length 982
  Top Layer w8: v1(3067,3296) 3067,3247 3086,3228 D10.2@3081.11,3228.64
  Bottom Layer w8: v1@3065,3293 3513,3293 3651,3431 3673.01,3431 ; 3673.72,3430.28 3770.28,3430.28 3777.31,3437.31 3777.31,3471.31 3799.5,3493.5 3824.85,3493.5 3829.82,3498.47 U2.19@3861.56,3498.47
LED_RED_4: D15.2 U2.21 | length 1420.2
  Top Layer w8: D15.2@3029.12,2916.92 3029.12,2911 3023,2911 2973.75,2911 2963,2921.75 2963,3242 3260,3539 v1(3620,3539)
  Bottom Layer w8: v1@3620,3539.84 3797.16,3539.84 ; 3797,3540 3797.16,3539.84 ; 3798,3539.84 3797.16,3539.84 ; U2.21@3861.56,3537.84 3799.16,3537.84 3797.16,3539.84
LIGHT_B: R28.1 R29.1 U4.5 | length 2365.9
  Top Layer w8: v1(4242,3135) 4209,3168 4209,3307 4323,3421 4473,3421 4508,3456 4508,4281 v1(4524,4297)
  Bottom Layer w8: R29.1@4050,2665 4050,2725 4049.53,2725 R28.1@4049.53,2735 4049.53,2794.47 3917,2927 3917,2972 3936,2991 4248,2991 4265,3008 4265,3112 v1(4242,3135) ; v1(4524,4297) 4534.48,4286.52 U4.5@4629.77,4286.52
LIGHT_FL: R5.1 R6.1 U4.2 | length 2757
  Top Layer w8: v1(3038,5103) 3038,4848 3321,4565 3321,4506.28 3312,4497.28 v1(3312,4394)
  Bottom Layer w8: R5.1@2570,5020 R6.1@2675.47,5020 2679,5020 2762,5103 v1(3038,5103) ; v1(3312,4394) 3326,4408 4147.13,4408 4263.37,4291.75 ; 4263.69,4291.69 4266.37,4289 4410,4289 4471.54,4227.46 ; 4470.36,4227.36 4498.72,4199 4567,4199 4583.32,4215.32 4583.32,4218.66 4590.35,4225.69 4627.99,4225.69 U4.2@4629.77,4227.46
LIGHT_FR: R8.1 R9.1 U4.1 | length 2638.8
  Top Layer w8: v1(4191.93,4580.07) 4373,4399 4373,4237 v1(4357,4221) ; v1@4196,4905 4208,4893 4208,4797.37 4273,4732.37 v1(4273,4698) ; v1(4466,4972) 4507,5013 v1@4507,5069 ; v1@4799,5050 4874,5050 4961,4963 5097,4963 5194,5060 ; 5192.72,5060.97 5193.75,5062 5388,5062 R8.1@5430,5020 R9.1@5430,4954
  Bottom Layer w8: v1(4191.93,4580.07) 4273,4661.14 v1(4273,4698) ; v1@4193,4906 4263,4906 4327,4970 4451,4970 v1@4460,4979 ; v1(4357,4221) 4398.5,4179.5 4481.5,4179.5 4482,4179 4570,4179 4598.78,4207.78 U4.1@4629.77,4207.78 ; v1(4505,5064) 4510,5069 4781,5069 v1@4798,5052
  other v1: 4193,4905 4800,5049
MOT0_PWMA: J2.4 U4.47 | length 2383.1
  Top Layer w8: v1@4337,4905 4337,4980 v1(4392,5035) ; v1@4600,5038 4700,4938 v1(4938,4938) ; v1@5135,4666 v1@5332,4666
  Bottom Layer w8: J2.4@3749,5084 3749,5004 3797,4956 3916,4956 3967,4905 4126.65,4905 4156.15,4875.5 4214.9,4875.5 4227.9,4888.5 4268.13,4888.5 4284.63,4905 v1(4336,4905) ; v1@4393,5035 4492.28,5035 4492.78,5034.5 4604.5,5034.5 v1(4605,5035) ; v1(4938,4938) 4999,4938 5005,4944 5274,4944 5320.19,4897.81 5320.19,4679.81 v1(5332,4668) ; U4.47@5105.17,4742.23 5105.17,4704 v1@5128,4681.17
  other v1: 5130,4670
MOT0_PWMB: J2.6 U4.18 | length 1290.8
  Top Layer w8: v1(3763,4869) 3801,4907 v1@3801,5007 ; v1@4251,4819 4261,4809 4261,4789.63 4386.63,4664 4409.5,4664 4423,4650.5 4463.93,4650.5 v1(4572,4542.43)
  Bottom Layer w8: v1@3763,4867 3763,4841 3802.5,4801.5 4058.78,4801.5 4067.78,4810.5 4092.22,4810.5 4095.72,4807 4235,4807 4239,4811 4259,4811 v1@4262,4808 ; v1@3800,5007 J2.6@3800,5089.98 ; v1(4572,4542.43) U4.18@4629.77,4542.43
  other v1: 4260,4811 3802,5005
MOT1_PWMA: J2.8 U4.66 | length 2352.8
  Top Layer w8: v1@3853,5005 3858,5000 v1(3858,4874) ; v1@4619,4816 4680,4755 5017,4755 5060,4712 5347,4712 5434.5,4624.5 5434.5,4449 v1@5454,4429.5
  Bottom Layer w8: v1(3851,5003) J2.8@3851,5068 ; v1@3857,4874 3866,4883 3894.28,4883 3895.78,4881.5 4009.8,4881.5 4016.34,4874.96 ; 4016.37,4875 4029.63,4875 4045.63,4859 4221.03,4859 4234.53,4872.5 4285.47,4872.5 4293.97,4864 4305.63,4864 4310.13,4859.5 4424.5,4859.5 4468,4816 4547.72,4816 4557.72,4826 4617,4826 v1(4621,4830) ; U4.66@5226.23,4384.94 5409.94,4384.94 5450,4425 v1(5450,4421)
MOT1_PWMB: J2.10 U4.67 | length 1895.8
  Top Layer w8: v1@3902,5010 3902,4963 3946,4919 v1(3946,4831) ; v1@4604,4784 4601,4781 4643,4739 4978,4739 5082,4635 5082,4542.35 5061.5,4521.85 5061.5,4484.15 5082,4463.65 5082,4438 v1(5118,4402)
  Bottom Layer w8: v1(3900,5008) J2.10@3900,5072 ; v1@3944,4830 3956.96,4842.96 4000.41,4842.96 4016.37,4827 4234.28,4827 4247.78,4840.5 4272.22,4840.5 4315.72,4797 4562.63,4797 4574.63,4785 v1(4604,4785) ; v1(5118,4402) 5154.74,4365.26 U4.67@5226.23,4365.26
NetANT1_1: ANT1.1 ANT2.1 C5.1 C6.2 | length 942.7
  Top Layer w8: ANT1.1@2515,3731 2527,3731 2766,3731 ; ANT1.1@2527,3730 2688,3730 ; ANT2.1@2643,3490 2664,3511 ; C6.2@2892.31,3845 C6.2@2892.31,3847 C5.1@2892.31,3884.69
  Top Layer w20: ANT2.1@2640,3490 2643,3490 2664,3511 2664,3554 2776.32,3666.32 2776.32,3729
  Top Layer w25: 2776.32,3729 C6.2@2892.31,3845
NetC1_2: C1.2 R1.1 U1.9 XTAL1.1 | length 353.6
  Top Layer w8: XTAL1.1@2565,4209 2565,4163 2570,4158 R1.1@2712,4158 ; XTAL1.1@2579,4225 2579,4297 C1.2@2582.31,4297 ; R1.1@2701,4150.32 2712,4150.32 U1.9@2784.24,4150.32
NetC2_2: C2.2 R1.2 U1.10 XTAL1.3 | length 374
  Top Layer w8: C2.2@2617.69,4016 2616.69,4015 2617,4016 2617,4017 2617,4081 XTAL1.3@2622.94,4086.94 ; XTAL1.3@2627.99,4072.01 XTAL1.3@2627.99,4076 ; XTAL1.3@2627.99,4081.89 XTAL1.3@2627.99,4076 ; XTAL1.3@2641,4070 2641,4059 2624.05,4075.95 2624,4076 XTAL1.3@2627.99,4076 ; R1.2@2712,4102.47 2650.57,4102.47 XTAL1.3@2637.05,4088.95 ; R1.2@2712.74,4101.74 2741.63,4130.63 U1.10@2784.24,4130.63 ; XTAL1.3@2622.94,4086.94 XTAL1.3@2631,4095 ; XTAL1.3@2622.94,4086.94 XTAL1.3@2631,4095 ; XTAL1.3@2627.99,4076 2629.99,4076 XTAL1.3@2629.99,4077 ; XTAL1.3@2629.99,4077 2642,4077 2642,4081.89 2642,4083 2643,4083 XTAL1.3@2637.05,4088.95 ; XTAL1.3@2629.99,4077 2629.99,4081.89 XTAL1.3@2637.05,4088.95 ; XTAL1.3@2631,4095 XTAL1.3@2636.05,4089.95 ; XTAL1.3@2631,4095 XTAL1.3@2636.05,4089.95 ; XTAL1.3@2636.05,4089.95 XTAL1.3@2637.05,4088.95 ; XTAL1.3@2636.05,4089.95 XTAL1.3@2637.05,4088.95
NetC3_2: C3.2 C4.2 L2.2 U1.11 | length 183.4
  Top Layer w8: C4.2@2762,3966.69 2761,3964.69 2761,3964 2762,3964 2801,3964 2801,3966.69 L2.2@2801,4000 ; L2.2@2802.31,4002 2802.31,4000 L2.2@2801,4000 ; U1.11@2822.63,4092.24 2801,4070.61 2801,4002 L2.2@2801,4000